# Altium PCB PCB1.PcbDoc
Units mil, origin at the board's own origin, x right, y up, seen from the top; angles counter-clockwise.
Board outline 1900 x 1680 mil, 2 copper layers (Top Layer, Bottom Layer); 3 components, 3 nets, 8 pads, 0 vias.
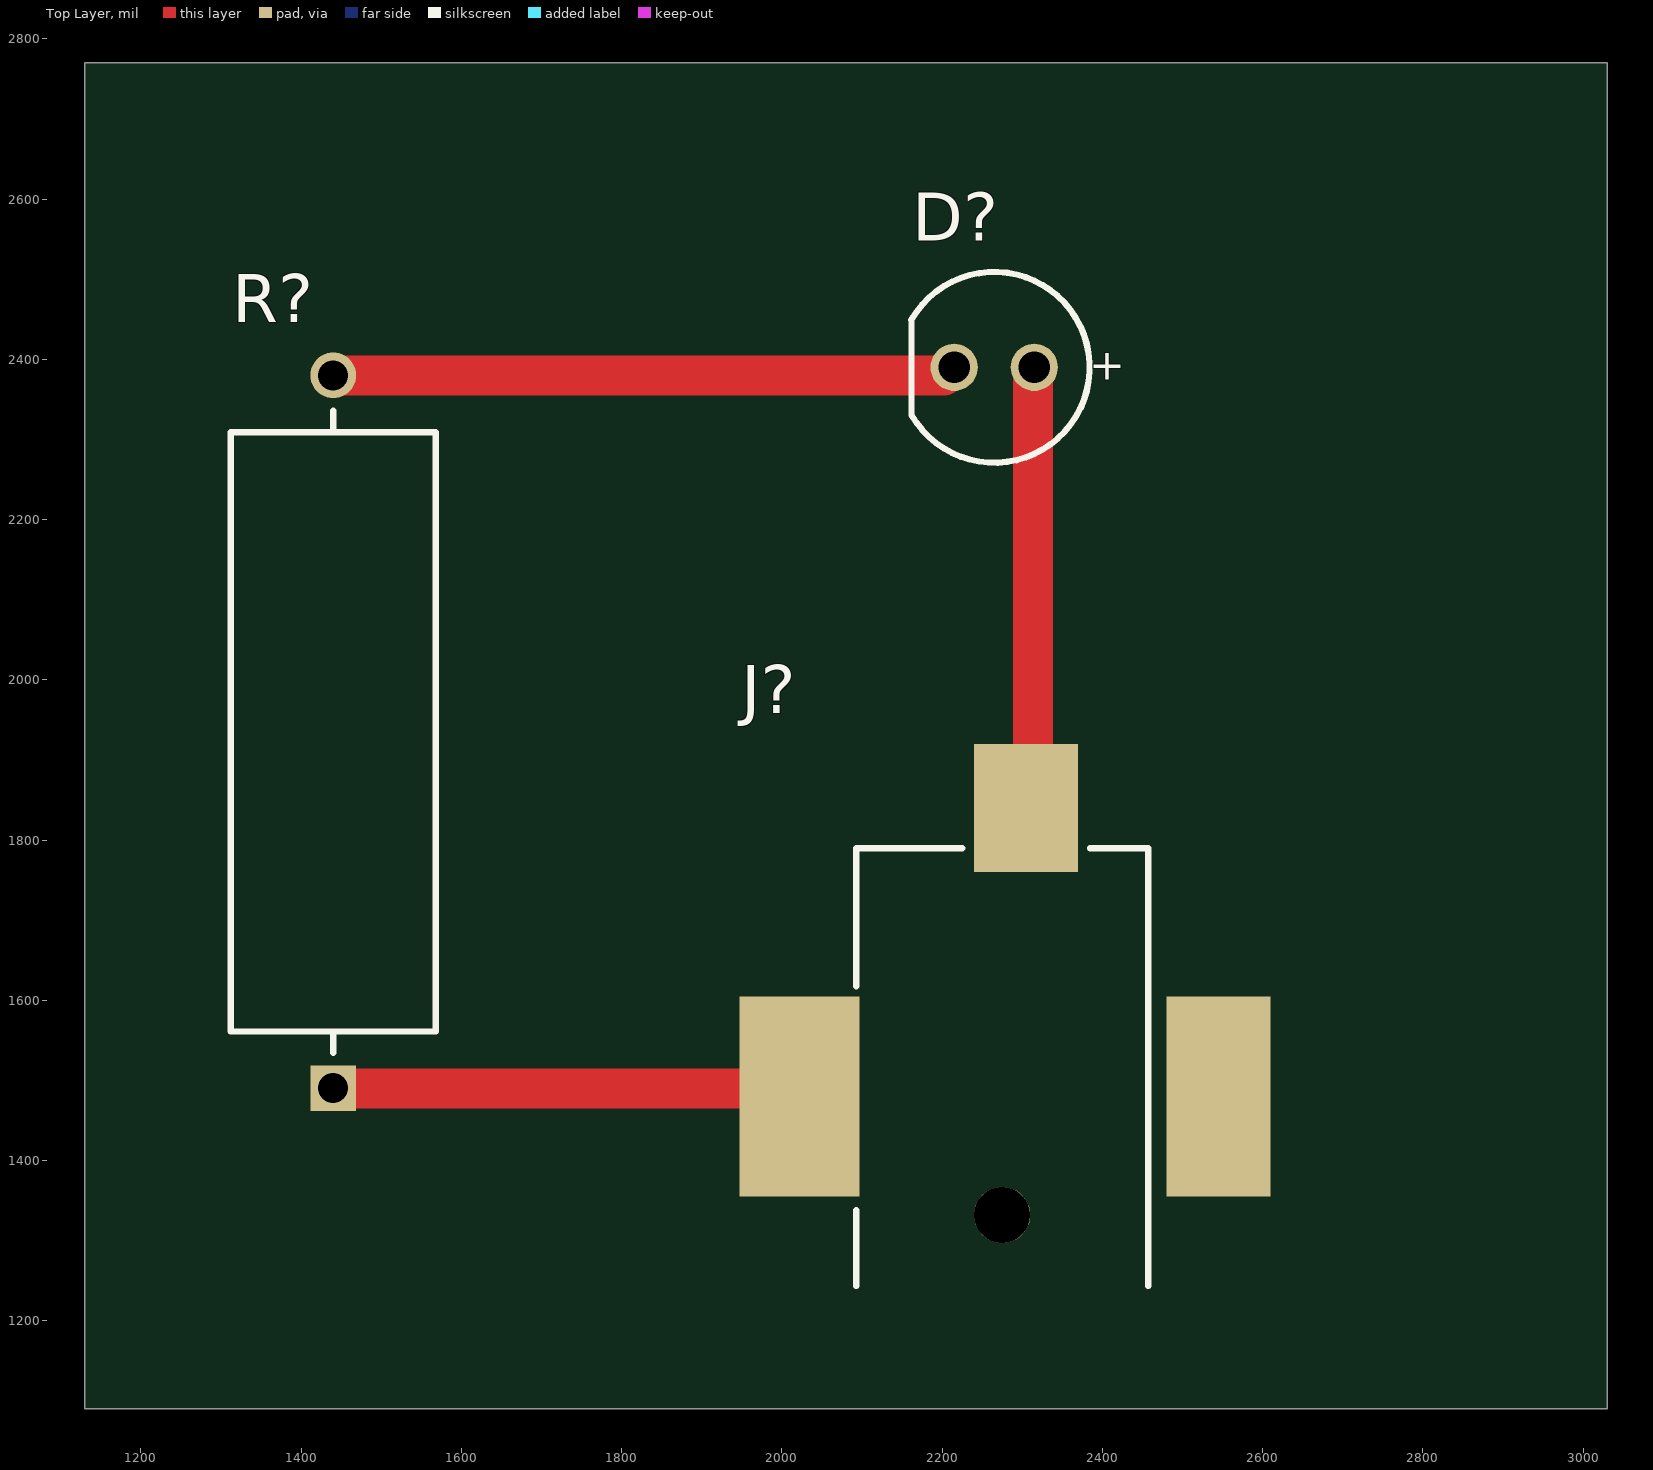
[diagram p0: Top Layer view]
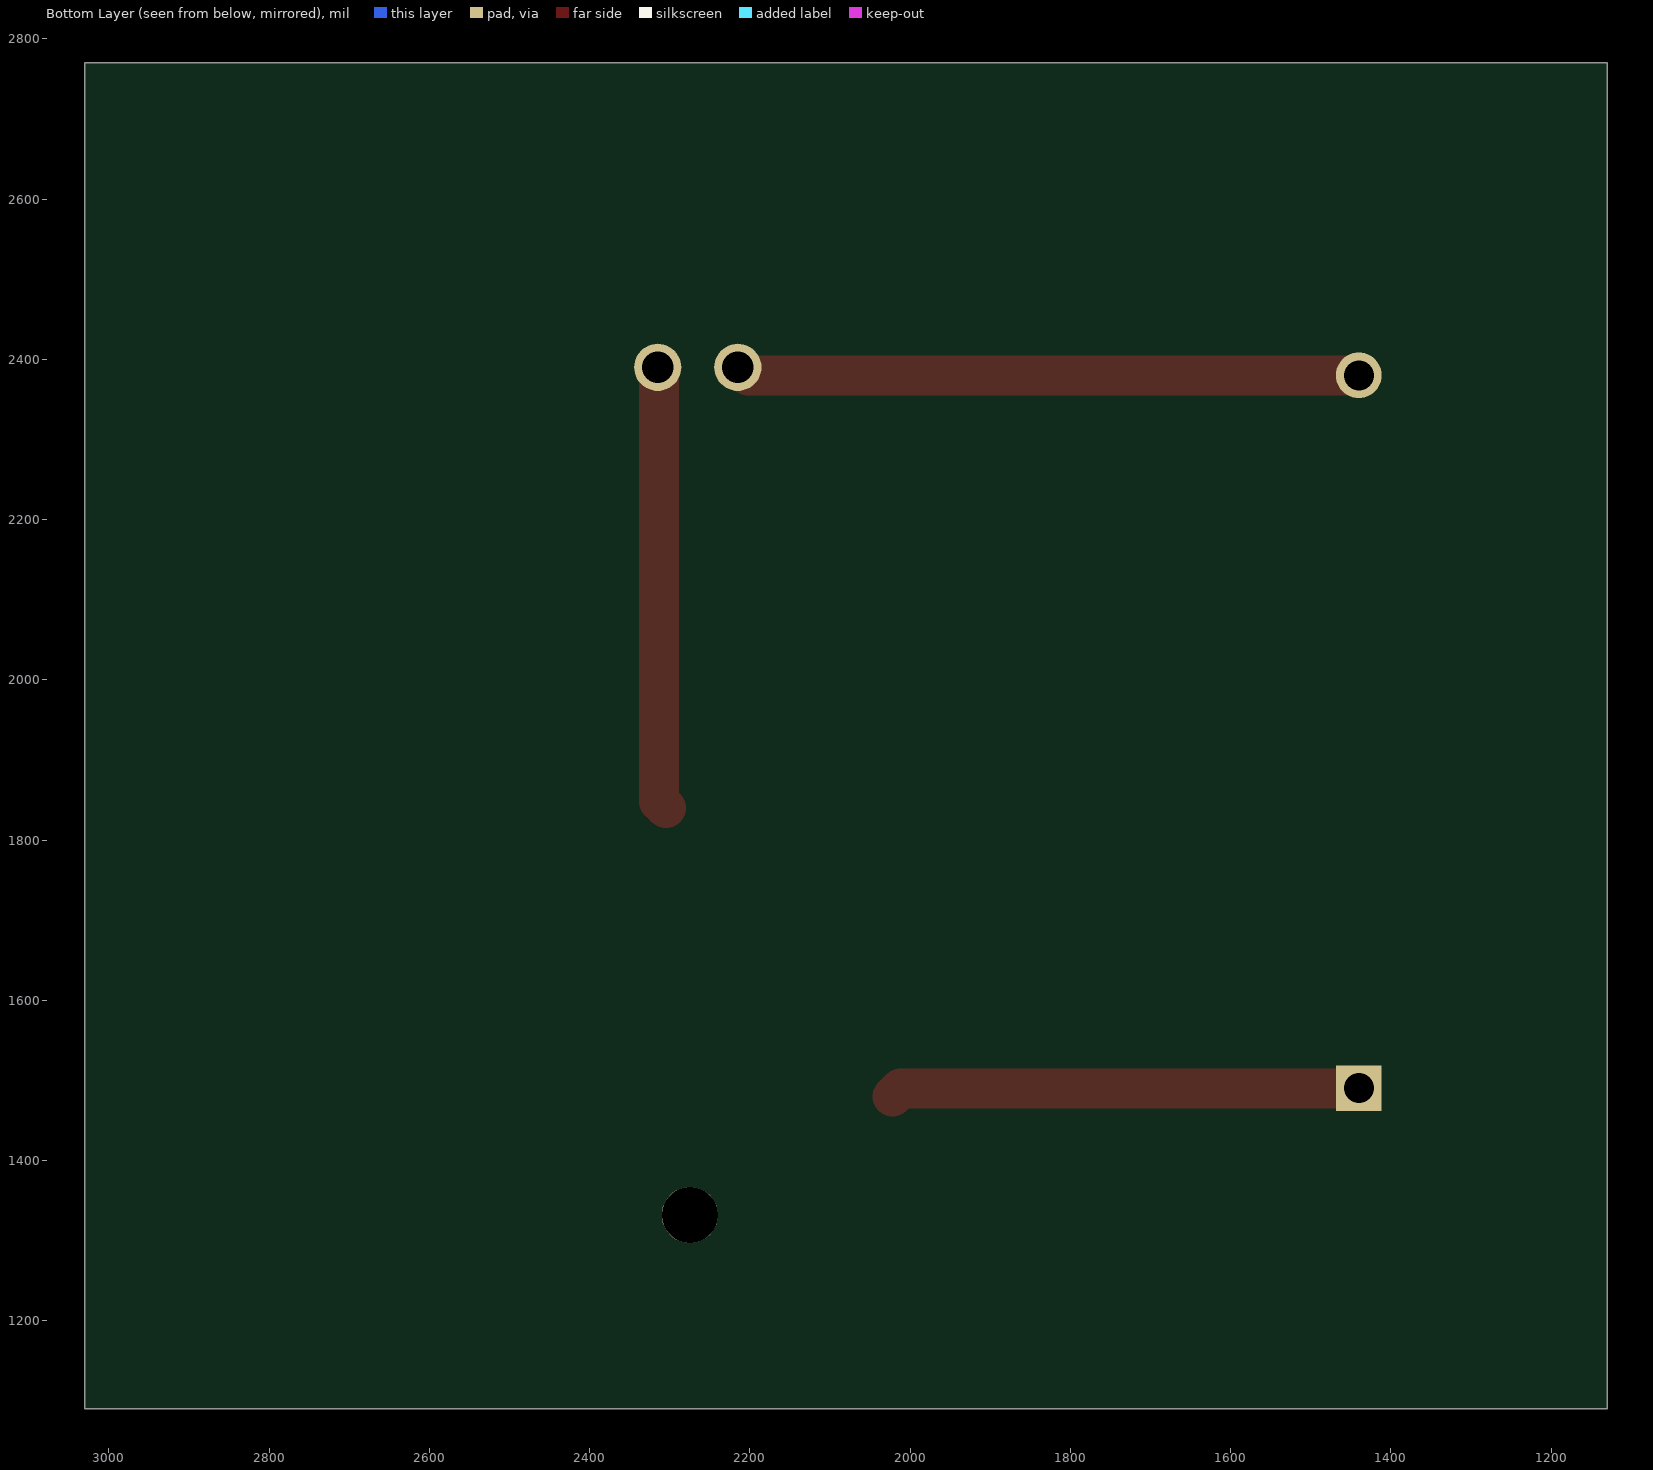
[diagram p1: Bottom Layer view, seen from below]
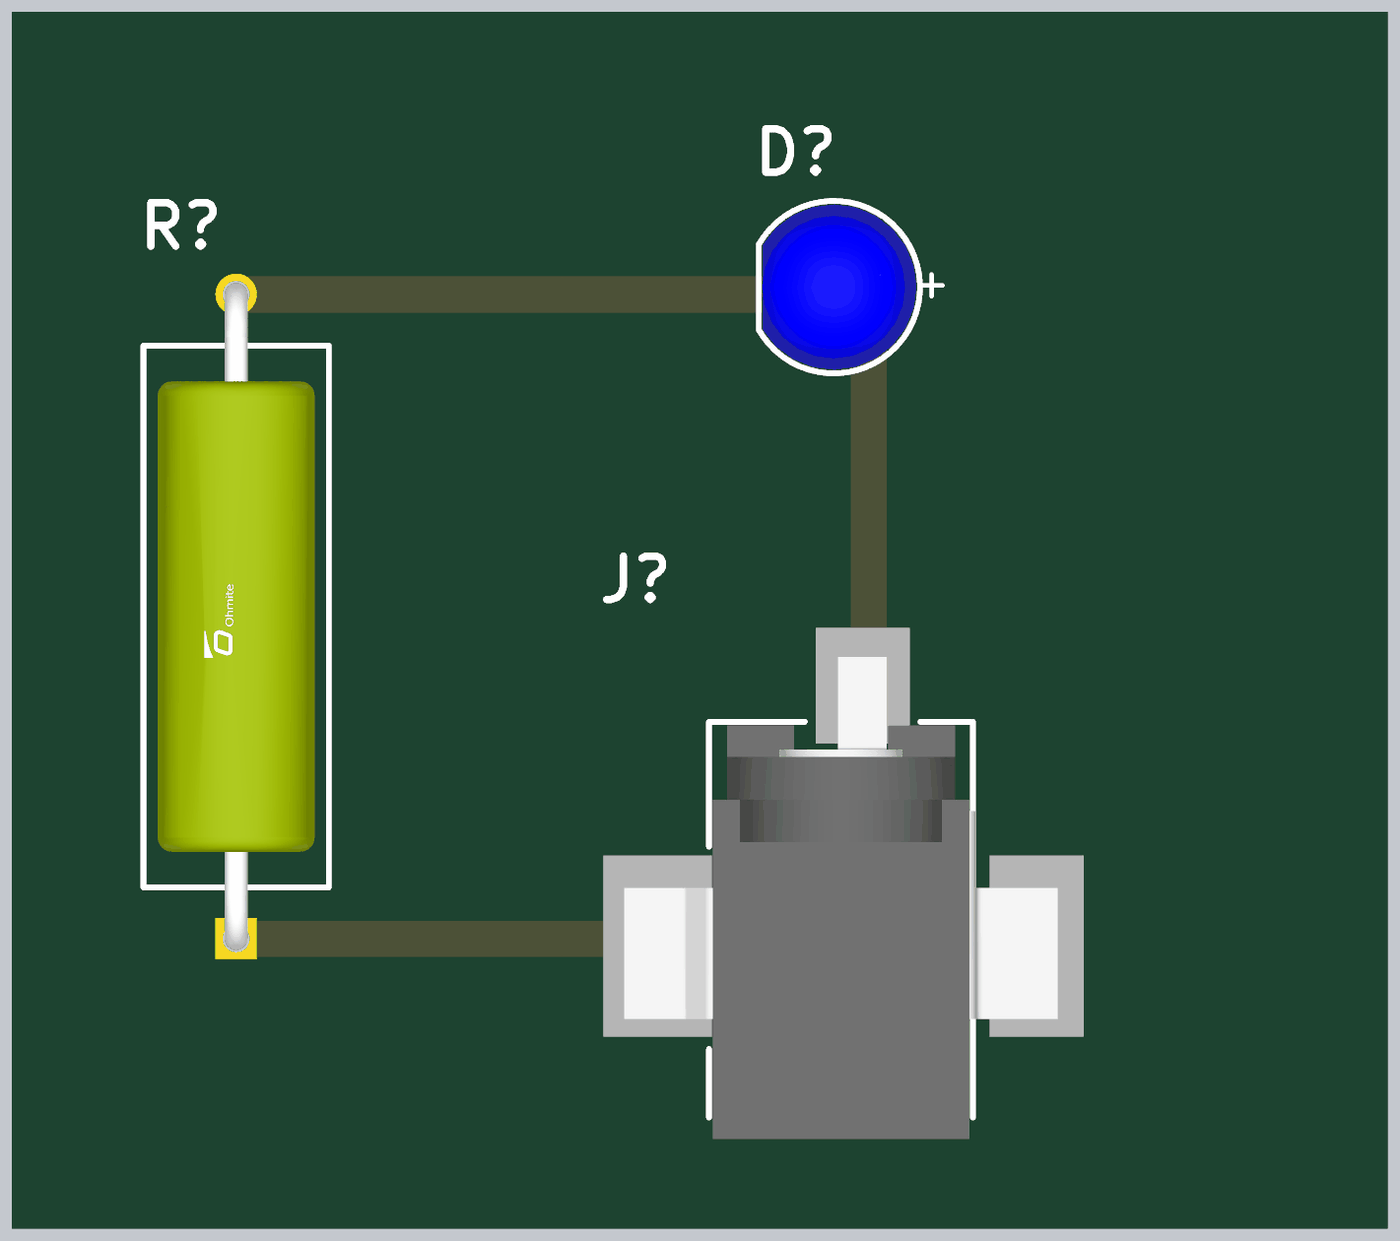
[diagram p2: 3D render of the assembled board from above, using the file's embedded part models]

## Layer stack, top to bottom
Top Solder: solder mask 0.4, Solder Resist, Dk 3.5
Top Layer: signal copper 1.4
Dielectric 1: dielectric 12.6, FR-4, Dk 4.8
Bottom Layer: signal copper 1.4
Bottom Solder: solder mask 0.4, Solder Resist, Dk 3.5

## Board outline
1130,1090 1130,2770 3030,2770 3030,1090

## Design rules (kind name [scope] priority, off if disabled: settings)
Clearance [All] p1: gap=10 ignorepadtopadclearanceinfootprint=FALSE
PolygonConnect [All] p1: connectstyle=Relief reliefconductorwidth=10 reliefentries=4 polygonreliefangle="90 Angle" airgapwidth=10
RoutingVias [All] p1: holewidth=28 width=50 viastyle="Through Hole" minholewidth=28 minwidth=50 maxholewidth=28 maxwidth=50
SolderMaskExpansion [All] p1: expansion=0 istentingtop=FALSE
Width [All] p1: maxlimit=100 minlimit=10 preferedwidth=50
30 further rules are at their usual default settings.

## Components (designator, comment, footprint, x,y, rotation, side; value= is the part's Value field where it differs from the comment)
D? "15400594F3590" WL-TIRC_5mm 2265,2390 r180 top
J? "RASM722PTR13X" FP-RASM722PTR13X-MFG 2274.92,1499.29 r0 top
R? "OX47GKE" FP-OX-MFG 1440,1935.12 r90 top

## Footprints (in the part's own frame and the unit in brackets; to place one, negate y for a bottom-side part, rotate by r counter-clockwise, add the part's x,y. Pads: shape width x height; smd on the part's side, far side on the other; paste and mask are expansions set on the pad)
FP-OX-MFG [mm]
  rect 1.45x1.45 hole 0.95 paste-2539.97 mask+0: 1(-11.3,0)
  round 1.45 hole 0.95 paste-2539.97 mask+0: 2(11.3,0)
  silkscreen extent -10.18,-3.25 10.18,3.25, body extent -12.12,-3.35 12.12,3.35, height 0.25
FP-RASM722PTR13X-MFG [mm]
  rect 3.3x4.06 smd paste+0 mask+0: 1(0.76,8.65)
  rect 3.81x6.35 smd paste+0 mask+0: 2(-6.43,-0.49)
  rect 3.3x6.35 smd paste+0 mask+0: 3(6.86,-0.49)
  round 1.78 hole 1.78 unplated paste-2539.97 mask+0: ""(0,-4.25)
  silkscreen extent -4.63,-6.5 4.63,7.38, body extent -8.43,-7.48 8.61,10.78, height 0.25
WL-TIRC_5mm [mm]
  round 1.5 hole 1: 1(-1.27,0) 2(1.27,0)
  silkscreen extent -3.02,-3.02 2.63,3.02, body extent -2.9,-2.9 2.5,2.9, height 6.2

## Part data
D?: library part CMP-03913-110288041-3, "Led, 5Mm, 940Nm, 30Mw/Sr, Th Rohs Compliant: Yes", Forward Current=1A, Forward Voltage=1.3V, Manufacturer Lifecycle Status=ACTIVE, Max Operating Temperature=85°C, Max Reverse Voltage (DC)=5V, Min Operating Temperature=-40°C, Height=8.6mm, Length=5.8mm, Lifecycle Status=Production, Peak Wavelength=940nm, RoHS=Compliant, Viewing Angle=30°, Width=5mm, YEOL="1 = Estimated lifetime > 10 years"
J?: library part CMP-47995-000002-1, "CONN PWR JACK 2.1X5.5MM SOLDER", Case/Package=SMD/SMT, Color=Black, Current Rating=5A, Package Quantity=120, Connector Type=Jack, Contact Material="Copper Alloy", Contact Plating=Tin, Gender=Male, Housing Color=Black, Housing Material=Thermoplastic, Mount="Surface Mount", Shielding=Unshielded, Termination=Solder
R?: library part CMP-00273-00060511-1, "OX47GKE OX FIXED RESISTOR Axial Through Hole Resistor ±10% -1000/ -1600ppm/C 4.7Ohm 1W", Case/Package=Axial, Max Operating Temperature=220°C, Max Power Dissipation=1W, Min Operating Temperature=-40°C, Resistance=4.7Ω, Temperature Coefficient=300ppm/°C, Tolerance=10%, Voltage Rating=300V, Composition=Ceramic, Diameter=5.5mm, Features="Moisture Resistant", Height=6.5mm, Lead Diameter=800µm, Lead Free="Lead Free", Lead Length=38mm, Length=16.51mm, Material=Ceramic, Mount="Through Hole", NexarPartId=60511, Number of Pins=2, Number of Terminations=2, Packaging=Bulk, Power Rating=1W, REACH SVHC=Unknown, RoHS=Compliant, Termination=Axial, Voltage Rating (DC)=300V, Wire/Cable Diameter=787.4µm

## Nets (pads, with @x,y where several pads share a name; then routed paths per layer and width w, separated by ;. In a path a pad name is that pad's centre, name@x,y a point inside that pad or via, vN(x,y) a via of type N, cw(c..) or ccw(c..) an arc to the next point about the centre after c; other vN are vias at no path point)
NetD?_1: D?.1 J?.1 | length 554.4
  Top Layer w50: J?.1 2313.27,1848.27 2313.27,2388.27 D?.1
NetD?_2: D?.2 R?.2 | length 774.2
  Top Layer w50: R?.2@1445,2379.88 2202.43,2379.88 2212.55,2390 D?.2
NetJ?_2: J?.2 R?.1 | length 581
  Top Layer w50: R?.1@1445,1490.12 2011.65,1490.12 J?.2
pads on no net: J?. J?.3

## Silkscreen, mask and mechanical layers (free items; w line width, h text height)
Mechanical 1:
  the board outline again, w10

## Text inside footprints (layer, text, board x,y; h text height)
D?: Top Overlay "+" at 2428.39,2407.72 h39.37 r180